# Altium PCB M1.5_A2L1_release1.0.PcbDoc
Units mm, origin at the board's own origin, x right, y up, seen from the top; angles counter-clockwise.
Board outline 40 x 50 mm, 2 copper layers (Top Layer, Bottom Layer); 59 components, 67 nets, 241 pads, 132 vias.
Unrouted connection lines stored in the file: 7.
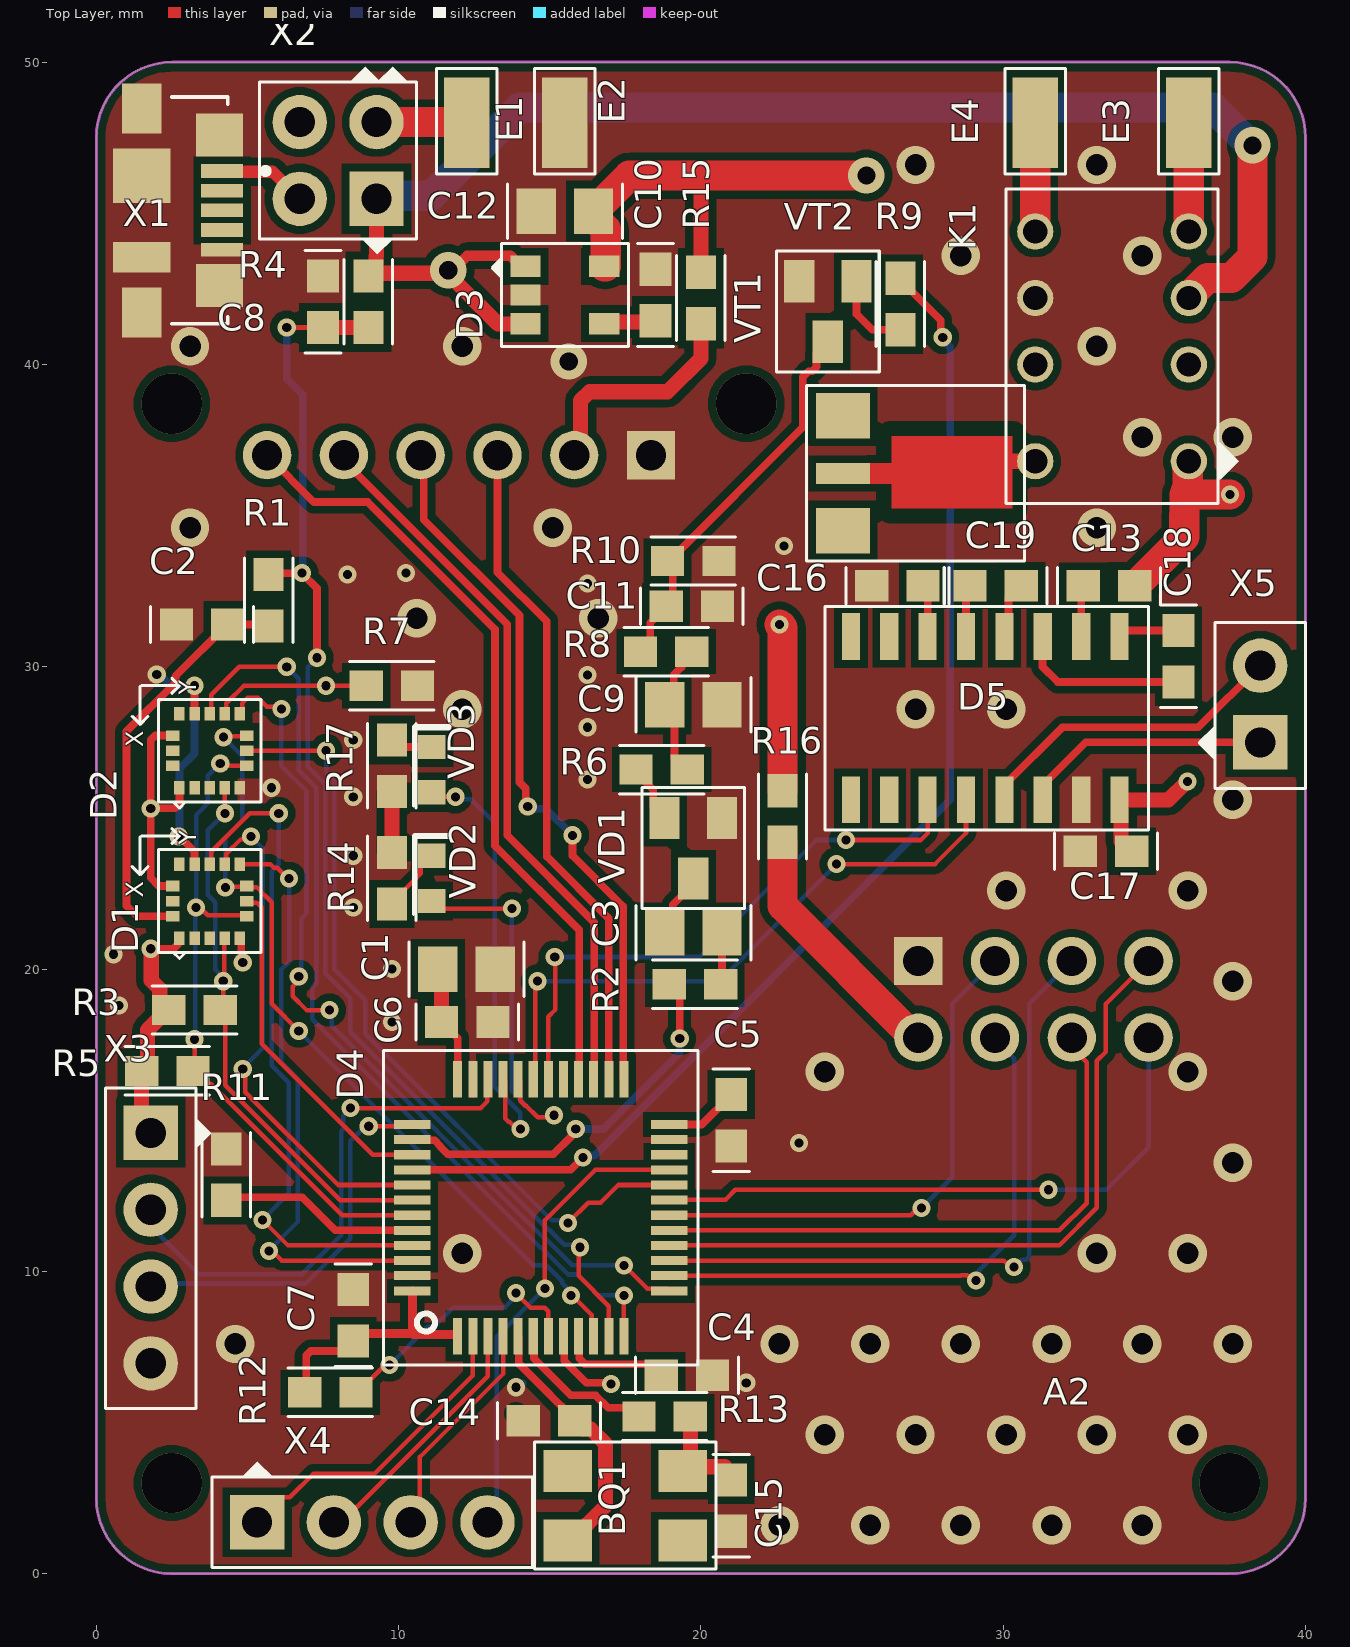
[diagram p0: Top Layer view]
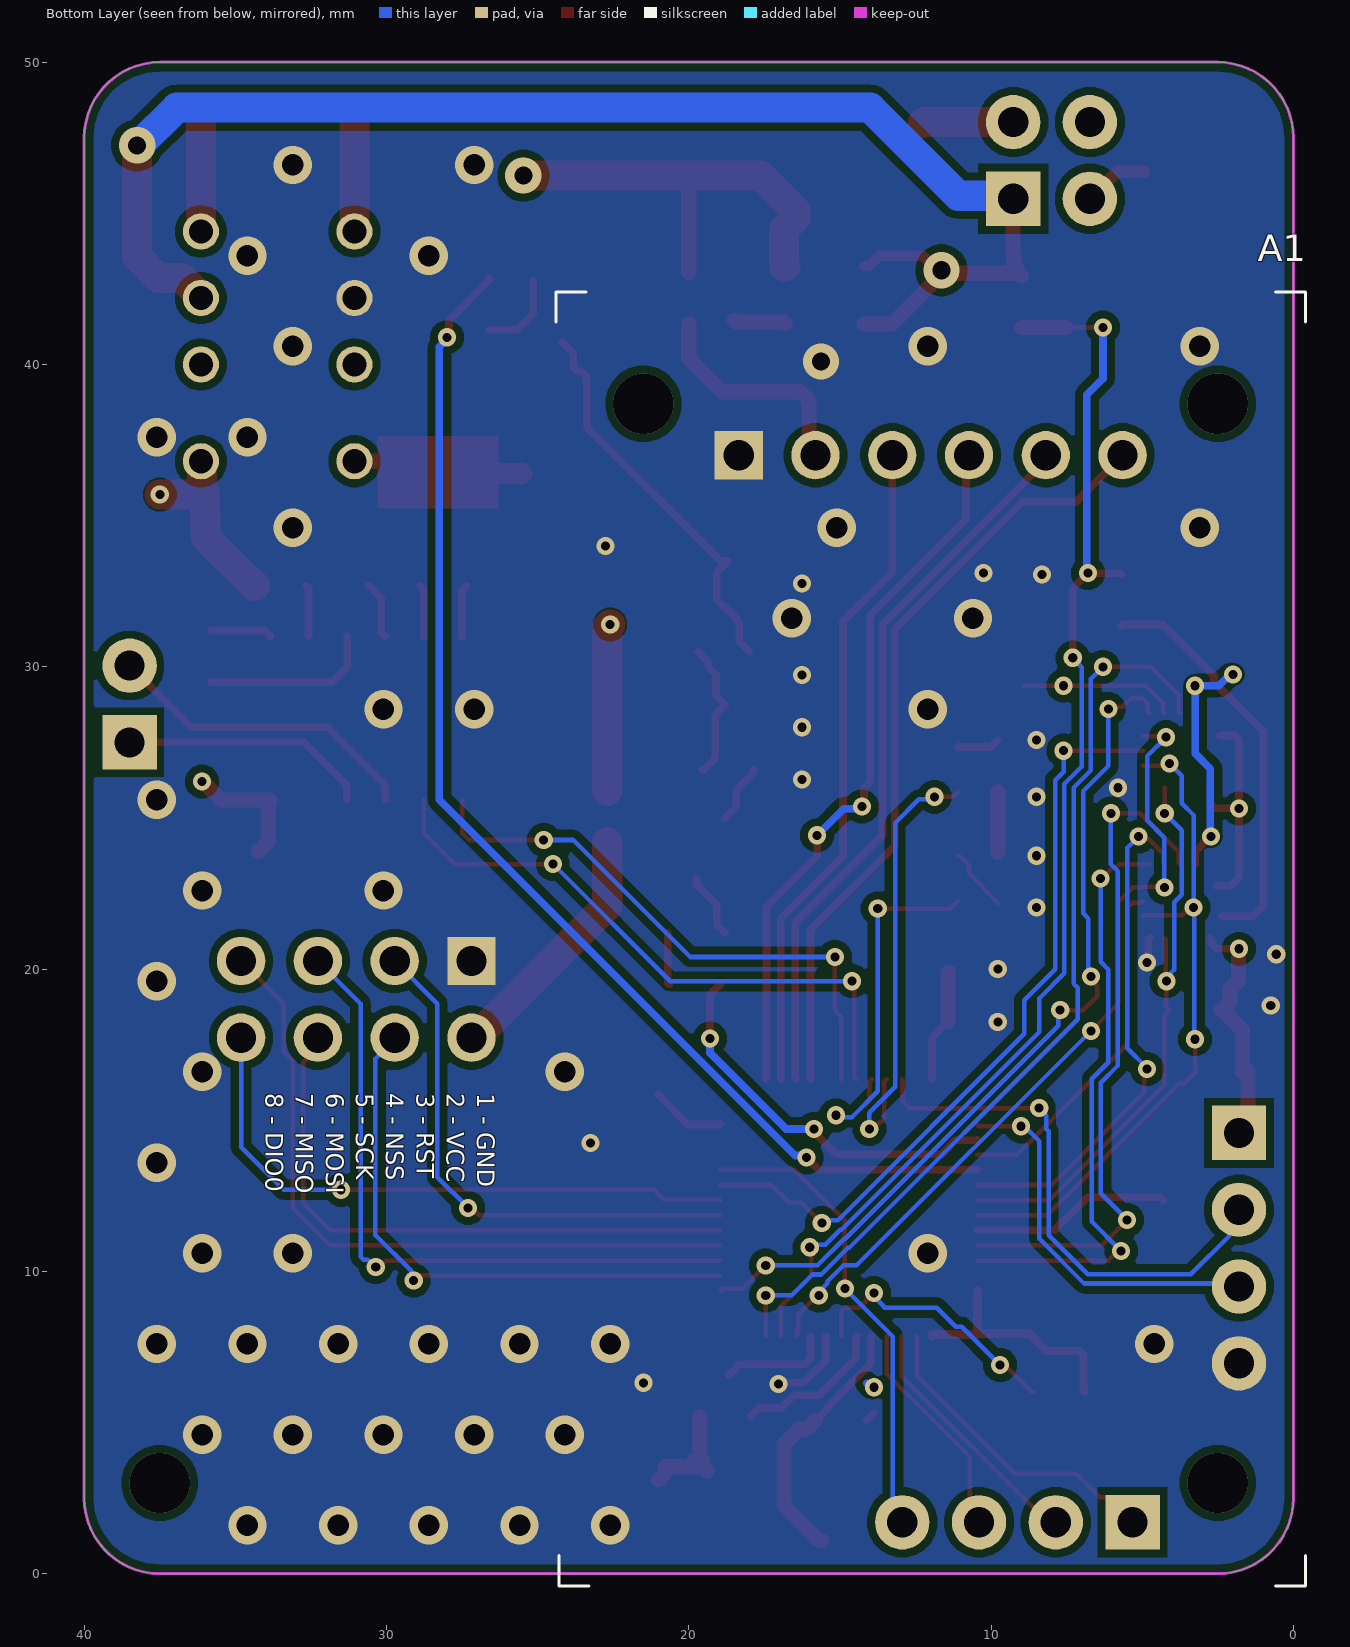
[diagram p1: Bottom Layer view, seen from below]
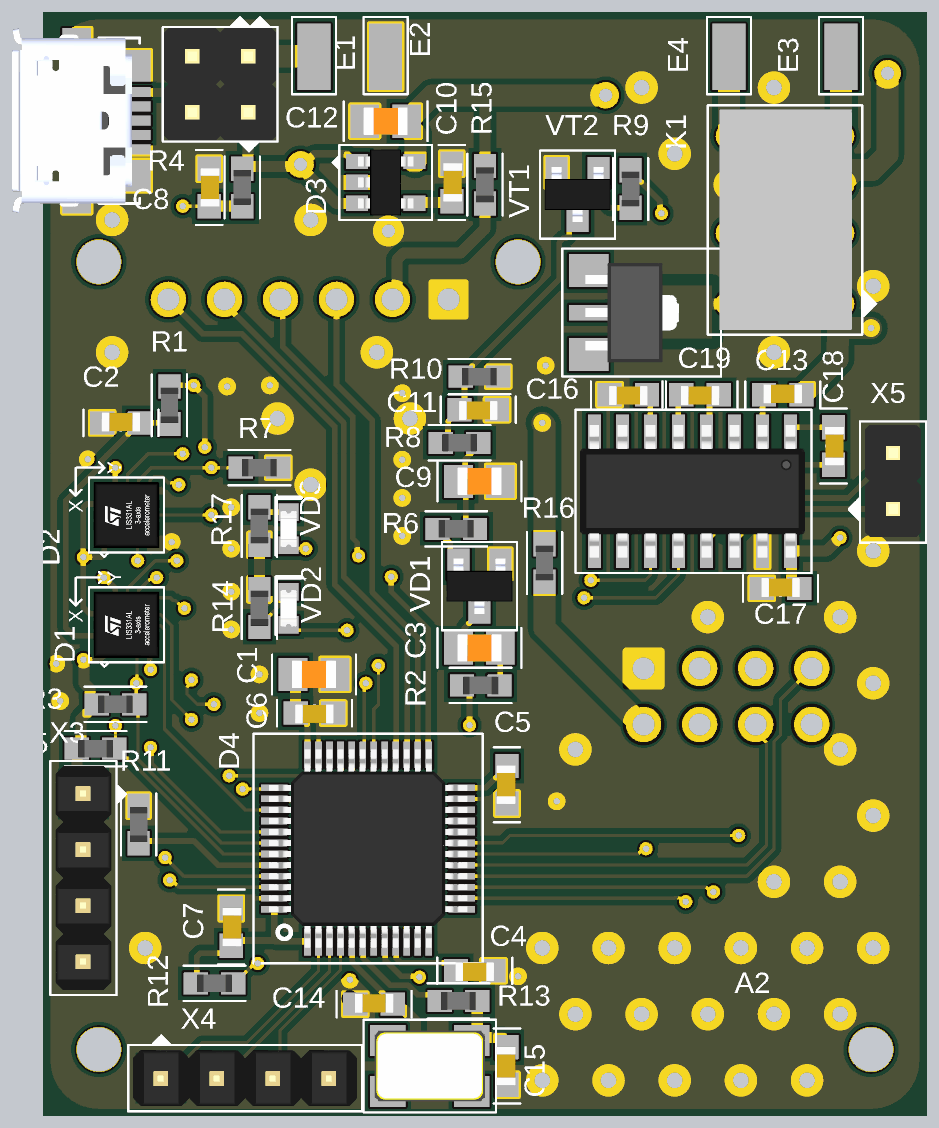
[diagram p2: 3D render of the assembled board from above, using the file's embedded part models]

## Layer stack, top to bottom
Top Solder: solder mask 0.0102, Solder Resist, Dk 3.5
Top Layer: signal copper 0.0356
Dielectric 1: dielectric 0.32, FR-4, Dk 4.8
Bottom Layer: signal copper 0.0356
Bottom Solder: solder mask 0.0102, Solder Resist, Dk 3.5

## Board outline
2.5,0 cw(c2.5,2.5) 0,2.5 0,47.5 cw(c2.5,47.5) 2.5,50 37.5,50 cw(c37.5,47.5) 40,47.5 40,2.5 cw(c37.5,2.5) 37.5,0

## Design rules (kind name [scope] priority, off if disabled: settings)
Clearance [All] p1: gap=0.254 ignorepadtopadclearanceinfootprint=TRUE except(0: Arc-Hole Track-Hole SMDPad-Hole THPad-Hole Via-Hole Fill-Hole Poly-Hole Region-Hole Text-Hole; 0.153: Arc-Arc Arc-Track Track-Track; 0.2: Arc-SMDPad Arc-Via Track-SMDPad Track-Via SMDPad-SMDPad; 0.5: Fill-Fill Fill-Poly Fill-Region Region-Region)
MinimumSolderMaskSliver [All] p1: minsoldermaskwidth=0.1
PlaneClearance [All] p1: clearance=1
PlaneConnect [All] p1: planeconnectstyle=Direct reliefexpansion=0.508 reliefentries=4 reliefconductorwidth=0.254 reliefairgap=0.254
PolygonConnect [All] p1: connectstyle=Direct reliefconductorwidth=0.254 reliefentries=4 polygonreliefangle="90 Angle" airgapwidth=0.254
RoutingVias [All] p1: holewidth=0.3 width=1.27 viastyle="Through Hole" minholewidth=0.3 minwidth=0 maxholewidth=1 maxwidth=1.27
SolderMaskExpansion [All] p1: expansion=0.102 istentingtop=FALSE
Width [All] p1: maxlimit=1 minlimit=0.15 preferedwidth=0.254
27 further rules are at their usual default settings.

## Classes and differential pairs
net class UART_EXT: UART_RX UART_TX
net class SW_INT: SWCLK SWDIO
net class RS-232: R1OUT_RS232 T1OUT_RS232
net class LED: LED1 LED2 UART_RX UART_TX
net class 8MHz: 8MHz_IN 8MHz_OUT NetBQ1_3

## Components (designator, comment, footprint, x,y, rotation, side; value= is the part's Value field where it differs from the comment)
A1 "Module SDCard-SPI 42*24mm" "Module SD2SPI" 12,37 r270 bottom locked
A2 "Ra-01 (LoRa SX-1278)" "Module SX1278" 31,19 r270 top
BQ1 "830055663" Quartz5032 17.5,2.25 r0 top
C1 "10µ" Cap0805 12.25,20 r0 top
C2 "0.1µ" Cap0603 3.5,31.4 r180 top
C3 "10µ" Cap0805 19.75,21.2 r0 top
C4 "0.1µ" Cap0603 19.538,6.565 r0 top
C5 "0.1µ" Cap0603 21,15 r270 top
C6 "0.1µ" Cap0603 12.27,18.25 r0 top
C7 "0.1µ" Cap0603 8.5,8.55 r90 top
C8 "0.1µ" Cap0603 7.5,42.075 r90 top
C9 "10µ" Cap0805 19.75,28.75 r0 top
C10 "0.47 µ" Cap0603 18.5,42.3 r90 top
C11 "0.1µ" Cap0603 19.7,32 r0 top
C12 "10µ" Cap0805 15.5,45.073 r180 top
C13 "0.1µ" Cap0603 33.5,32.68 r180 top
C14 "10p" Cap0603 14.976,5.056 r180 top
C15 "10p" Cap0603 21,2.25 r270 top
C16 "0.1µ" Cap0603 26.5,32.68 r0 top
C17 "0.1µ" Cap0603 33.399,23.9 r180 top
C18 "0.1µ" Cap0603 35.8,30.35 r90 top
C19 "0.1µ" Cap0603 29.75,32.68 r0 top
D1 "LIS3DHTR" LGA-16 3.75,22.25 r90 top locked
D2 "LIS3DHTR" LGA-16 3.75,27.225 r90 top locked
D3 "MIC5219-3.3BM5-TR" SOT23-5 15.5,42.3 r270 top
D4 "STM32F103C8T6TR" LQFP-48 14.704,12.109 r0 top locked
D5 "ADM3202ARNZ" "SOIC-16 (3.9mm Width)" 29.405,28.3 r270 top
E1 "Lamel_1pin" Lamel_1pin(1.5*3) 12.25,48 r0 top
E2 "Lamel_1pin" Lamel_1pin(1.5*3) 15.5,48 r0 top
E3 "Lamel_1pin" Lamel_1pin(1.5*3) 36.14,48 r0 top
E4 "Lamel_1pin" Lamel_1pin(1.5*3) 31.06,48 r0 top
K1 "IM02TS" IM02TS 33.6,40.6 r90 top
R1 "5K1" RES0603 5.7,32.2 r270 top
R2 "0R" RES0603 19.804,19.5 r0 top
R3 "10K" RES0603 3.25,18.646 r180 top
R4 "5K1" RES0603 9,42.075 r270 top
R5 "10K" RES0603 2.35,16.633 r180 top
R6 "10K" RES0603 18.7,26.6 r0 top
R7 "0R" RES0603 9.778,29.374 r180 top
R8 "2K" RES0603 18.85,30.5 r180 top
R9 "2K" RES0603 26.6,42 r270 top
R10 "10K" RES0603 19.748,33.5 r180 top
R11 "10K" RES0603 4.3,13.2 r90 top
R12 "10K" RES0603 7.743,6 r180 top
R13 "390R" RES0603 18.8,5.2 r0 top
R14 "5K1" RES0603 9.778,23.005 r90 top
R15 "0R" RES0603 20,42.2 r90 top
R16 "0R" RES0603 22.7,25.05 r90 top
R17 "5K1" RES0603 9.778,26.725 r270 top
VD1 "BAS40-04-HE3-08" SOT23 19.75,24 r0 top value=SOT-23-3
VD2 "19-213/GHC-YR1S2/3T" LED0603 11.1,23 r90 top
VD3 "19-213/GHC-YR1S2/3T" LED0603 11.1,26.6 r90 top
VT1 "BC846A,215" SOT23 24.2,41.75 r0 top
VT2 "BC868-25,115" SOT89 26.8,36.4 r270 top
X1 "47346-0001" MOLEX_47346-0001 1.5,45.1 r270 top
X2 "Header 2X2" PLS2-2 8,46.75 r180 top
X3 "Header 1X4" PLS1-4 1.8,10.77 r270 top locked
X4 "Header 1X4" PLS1-4 9.13,1.7 r0 top
X5 "Header 1X2" PLS1-2 38.5,28.77 r90 top

## Footprints (in the part's own frame and the unit in brackets; to place one, negate y for a bottom-side part, rotate by r counter-clockwise, add the part's x,y. Pads: shape width x height; smd on the part's side, far side on the other; paste and mask are expansions set on the pad)
Cap0603 [mm] "CC0603KRX7R9BB104"
  rect 1.1x1.05 smd paste+0: 1(-0.85,0)
  rect 1.1x1.05 smd: 2(0.85,0)
  silkscreen extent -1.7,-0.6 1.7,0.6, body extent -0.87,-0.48 0.87,0.4, height 0.95
Cap0805 [mm] "CC0805KKX7R6BB106"
  rect 1.3x1.5 smd: 1(-0.95,0) 2(0.95,0)
  silkscreen extent -1.9,-0.9 1.9,0.9, body extent -1,-0.63 1,0.63, height 0.8
IM02TS [mm] "IM02TS (THT VERSION)"
  round 1.2 hole 0.8 unplated: 1(-3.8,-2.54) 2(-0.6,-2.54) 3(1.6,-2.54) 4(3.8,-2.54) 5(3.8,2.54) 6(1.6,2.54) 7(-0.6,2.54) 8(-3.8,2.54)
  silkscreen extent -5.2,-4.2 5.2,3.5, body extent -4.99,-3.04 5.01,2.96, height 4.65
Lamel_1pin(1.5*3) [mm]
  rect 1.5x3 smd: 1(0,0)
  silkscreen extent -1,-1.7 1,1.79
LED0603 [mm] "Led_19/213_EVERLIGHT"
  rect 0.8x0.9 smd: 1(-0.75,0) 2(0.75,0)
  silkscreen extent -1.2,-0.55 1.4,0.6, body extent -0.83,-0.37 0.82,0.36, height 0.68
LGA-16 [mm] "LIS3DHTR (3*3)"
  rect 0.45x0.35 smd paste-1 mask+0.05: 1(-1.225,1)
  rect 0.45x0.35 smd mask+0.05: 2(-1.225,0.5) 3(-1.225,0) 4(-1.225,-0.5) 5(-1.225,-1) 9(1.225,-1) 10(1.225,-0.5) 11(1.225,0) 12(1.225,0.5) 13(1.225,1)
  rect 0.35x0.45 smd mask+0.05: 6(-0.5,-1.225) 7(0,-1.225) 8(0.5,-1.225) 14(0.5,1.225) 15(0,1.225) 16(-0.5,1.225)
  silkscreen extent -1.9,-1.7 2.4,2.56, body extent -1.5,-1.5 1.5,1.5, height 1.01
LQFP-48 [mm] "Dest: STM32F103C8T6 - (7*7)"
  rect 0.3x1.2 smd: 1(-2.75,-4.25) 2(-2.25,-4.25) 3(-1.75,-4.25) 4(-1.25,-4.25) 5(-0.75,-4.25) 6(-0.25,-4.25) 7(0.25,-4.25) 8(0.75,-4.25) 9(1.25,-4.25) 10(1.75,-4.25) 11(2.25,-4.25) 12(2.75,-4.25) 25(2.75,4.25) 26(2.25,4.25) 27(1.75,4.25) 28(1.25,4.25) 29(0.75,4.25) 30(0.25,4.25) 31(-0.25,4.25) 32(-0.75,4.25) 33(-1.25,4.25) 34(-1.75,4.25) 35(-2.25,4.25) 36(-2.75,4.25)
  rect 1.2x0.3 smd: 13(4.25,-2.75) 14(4.25,-2.25) 15(4.25,-1.75) 16(4.25,-1.25) 17(4.25,-0.75) 18(4.25,-0.25) 19(4.25,0.25) 20(4.25,0.75) 21(4.25,1.25) 22(4.25,1.75) 23(4.25,2.25) 24(4.25,2.75) 37(-4.25,2.75) 38(-4.25,2.25) 39(-4.25,1.75) 40(-4.25,1.25) 41(-4.25,0.75) 42(-4.25,0.25) 43(-4.25,-0.25) 44(-4.25,-0.75) 45(-4.25,-1.25) 46(-4.25,-1.75) 47(-4.25,-2.25) 48(-4.25,-2.75)
  silkscreen extent -5.2,-5.2 5.2,5.2, body extent -4.5,-4.5 4.5,4.5, height 1.6
"Module SD2SPI" [mm] "Arduino MicroSD to SPI Card reader 42*24*12mm"
  rect 1.6x1.6 hole 1 unplated: 1(0,-6.35)
  round 1.6 hole 1 unplated: 2(0,-3.81) 3(0,-1.27) 4(0,1.27) 5(0,3.81) 6(0,6.35)
  silkscreen extent -5.4,-12.4 37.4,12.4
"Module SX1278" [mm] "Ra-01"
  rect 1.6x1.6 hole 1 unplated mask+0.15: 1(-1.27,-3.81)
  round 1.6 hole 1 unplated mask+0.15: 2(1.27,-3.81) 3(-1.27,-1.27) 4(1.27,-1.27) 5(-1.27,1.27) 6(1.27,1.27) 7(-1.27,3.81) 8(1.27,3.81)
MOLEX_47346-0001 [mm] "Molex MicroUSB 473460001"
  rect 0.45x1.38 smd: 1(-1.3,2.66) 2(-0.65,2.66) 3(0,2.66) 4(0.65,2.66) 5(1.3,2.66)
  rect 1.425x1.55 smd: S1(-2.488,2.575) S2(2.488,2.575)
  rect 1.65x1.3 smd: S3(-3.375,0) S6(3.375,0)
  rect 1.8x1.9 smd: S4(-1.15,0)
  rect 1x1.9 smd: S5(1.55,0)
  silkscreen extent -3.75,1 3.75,4.2, body extent -4.18,-2.93 4.18,2.5, height 2.7
PLS1-2 [mm] "1R2 ( pitch 2.54mm) KLS1-207-1-2S"
  rect 1.8x1.8 hole 1 mask+0.102: 1(-1.27,0)
  round 1.8 hole 1: 2(1.27,0)
  silkscreen extent -2.8,-1.5 2.7,2, body extent -2.54,-1.27 2.54,1.27, height 8.54
PLS1-4 [mm] "1R4 ( pitch 2.54mm) KLS1-207-1-4S"
  rect 1.8x1.8 hole 1: 1(-3.81,0)
  round 1.8 hole 1: 2(-1.27,0) 3(1.27,0) 4(3.81,0)
  silkscreen extent -5.3,-1.5 5.3,2, body extent -5.08,-1.27 5.08,1.27, height 9.2
PLS2-2 [mm] "2R2 ( pitch 2.54mm) KLS1-207-2-2S"
  rect 1.8x1.8 hole 1: 1(-1.27,1.27)
  round 1.8 hole 1: 2(-1.27,-1.27) 3(1.27,1.27) 4(1.27,-1.27)
  silkscreen extent -2.6,-3.1 2.6,3.1, body extent -2.54,-2.54 2.54,2.54, height 8.54
Quartz5032 [mm] "WE-830055663"
  rect 1.6x1.4 smd: 1(-1.9,-1.15) 2(1.9,-1.15) 3(1.9,1.15) 4(-1.9,1.15)
  silkscreen extent -3,-2.1 3,2.1, body extent -2.5,-1.6 2.5,1.6, height 1
RES0603 [mm]
  rect 1.1x1 smd: 1(-0.85,0) 2(0.85,0)
  silkscreen extent -1.4,-0.8 1.4,0.8, body extent -0.8,-0.4 0.8,0.4, height 0.45
"SOIC-16 (3.9mm Width)" [mm] "ADM3202ARNZ (0.154\", 3.90mm Width)"
  rect 1.55x0.6 smd: 1(-2.7,4.445) 2(-2.7,3.175) 3(-2.7,1.905) 4(-2.7,0.635) 5(-2.7,-0.635) 6(-2.7,-1.905) 7(-2.7,-3.175) 8(-2.7,-4.445) 9(2.7,-4.445) 10(2.7,-3.175) 11(2.7,-1.905) 12(2.7,-0.635) 13(2.7,0.635) 14(2.7,1.905) 15(2.7,3.175) 16(2.7,4.445)
  silkscreen extent -3.7,-5.3 3.7,5.4, body extent -3,-5.1 3,5.1, height 1.7
SOT23 [mm] "BC846"
  rect 1x1.4 smd: 1(0.95,1) 2(-0.95,1) 3(0,-1)
  silkscreen extent -1.7,-2 1.7,2, body extent -1.5,-1.25 1.5,1.25, height 1.1
SOT23-5 [mm] "MIC5219-3.3BM5-TR"
  rect 0.7x1 smd: 1(-0.95,-1.3) 2(0,-1.3) 3(0.95,-1.3) 4(0.95,1.3) 5(-0.95,1.3)
  silkscreen extent -1.7,-2.4 1.7,2.1, body extent -1.5,-1.25 1.5,1.25, height 1.05
SOT89 [mm] "BC868 Transistor NPN"
  rect 1.5x1.8 smd: 1(1.9,-2.1) 3(-1.9,-2.1)
  rect 0.7x1.8 smd: 2(0,-2.1)
  Top Layer region: -1.238,-0.5 1.162,-0.5 1.162,3.5 -1.238,3.5
  Top Layer lines w0.7: 0,-1.275 0,-0.5
  silkscreen extent -2.9,-3.3 2.9,3.9, body extent -2.25,-2.25 2.25,2, height 1.54

## Part data
A1: library part "Module SDCard-SPI", "MicroSD Card adapter (42*24mm)/Arduino", Current consumption typ(max)="80mA (200mA)", Supply voltage=5±0.5V, ComponentLink1Description=Link, ComponentLink1URL=http://datalogger.pbworks.com/w/file/fetch/89507207/Datalogger%20-%20SD%20Memory%20Reader%20Datasheet.pdf, Connections="6pin IDC1-6", Dimensions=42*24*12mm, Manufacture Part Number="Module SDCard-SPI 42*24mm", Support format="Micro SDCard(<=2G), Micro SDHC(<=32G)", Weight=5g
A2: library part "Module SX1278", "SX1278 LoRa  433 MHZ/SPI /Spring Antenna/Ra - 01", ComponentLink1Description=Link, ComponentLink1URL=http://www.ai-thinker.com/pro_view-5.html, Manufacture Part Number="Ra-01 (LoRa SX-1278)"
BQ1: "WE-XTAL QUARTZ CRYSTAL 8.0 MHZ", Digi-Key Part Number=1923-830055663TR-ND, ESR (Equivalent Series Resistance)="150 Ohms", Frequency="8 MHz", Frequency Stability=±30ppm, Frequency Tolerance=±20ppm, Load Capacitance=18pF, Manufacture="Würth Elektronik", Operating Mode=Fundamental, Package/Case="4-SMD, No Lead", Catagory="Crystals, Oscillators, Resonators, Crystals", ComponentLink1Description=HelpURL, ComponentLink1URL=https://www.digikey.com/en/products/detail/w%C3%BCrth-elektronik/830055663/13900244?s=N4IgTCBcDaIBwGYAMSCsqBsGEgLoF8g, Manufacture Part Number=830055663, Price ($)=$0.65, Series=CFPX-104, Type="MHz Crystal"
C1 C3 C9 C12: library part CC0805KKX7R6BB106, "CAP CER 10UF 10V X7R 0805", Digi-Key Part Number=311-1879-2-ND, Manufacture=YAGEO, Package/Case="0805 (2012 Metric)", Temperature Coefficient=X7R, Tolerance=±10%, Capacitance=10µ, Catagory="Capacitors, Ceramic Capacitors", ComponentLink2Description=Link, ComponentLink2URL=https://www.digikey.com/en/products/detail/yageo/CC0805KKX7R6BB106/5195285, Manufacture Part Number=CC0805KKX7R6BB106, Price($/10)=$1.62
C2 C4 C5 C6 C7 C8 C11 C13 C16 C17 C18 C19: library part CC0603KRX7R9BB104, "CAP CER 0.1UF 50V X7R 0603", Digi-Key Part Number=311-1344-2-ND, Manufacture=YAGEO, Package/Case="0603 (1608 Metric)", Temperature Coefficient=X7R, Tolerance=±10%, Capacitance=0.1µ, Catagory="Capacitors, Ceramic Capacitors", ComponentLink2Description=Link, ComponentLink2URL=https://www.digikey.com/en/products/detail/yageo/CC0603KRX7R9BB104/2103082?s=N4IgTCBcDaIMJwAwDZEGYDSAlAGgdiwE4AhYgRkQBYQBdAXyA, Manufacture Part Number=CC0603KRX7R9BB104, Price($/10)=$0.54
C10: library part CC0603KRX7R6BB474, "CAP CER 0.47UF 10V X7R 0603", Digi-Key Part Number=311-1798-2-ND, Manufacture=YAGEO, Package/Case="0603 (1608 Metric)", Temperature Coefficient=X7R, Tolerance=±10%, Capacitance="0.47 µ", Catagory="Capacitors, Ceramic Capacitors", ComponentLink2Description=Link, ComponentLink2URL=https://www.yageo.com/upload/media/product/productsearch/datasheet/mlcc/UPY-GPHC_X7R_6.3V-to-50V_20.pdf, ComponentLink3Description="Link supplier", ComponentLink3URL=https://www.digikey.com/en/products/detail/yageo/CC0603KRX7R6BB474/5195206?s=N4IgTCBcDaIMJwAwDZEGYDSAlAGgdi2QCEiAWPUkAXQF8g, Manufacture Part Number=CC0603KRX7R6BB474, Price($/10)=$1.22
C14 C15: library part CQ0603JRNPO9BN100, "CAP CER 10PF 50V C0G/NPO 0603", Digi-Key Part Number=CQ0603JRNPO9BN100-ND, Manufacture=YAGEO, Package/Case="0603 (1608 Metric)", Temperature Coefficient="COG, NPO", Tolerance=±5%, Capacitance=10p, Catagory="Capacitors, Ceramic Capacitors", ComponentLink2Description=Link, ComponentLink2URL=https://www.digikey.com/en/products/detail/yageo/cq0603jrnpo9bn100/6097785, Manufacture Part Number=CQ0603JRNPO9BN100, Price($/20k)=$970,8
D1 D2: "ACCEL 2-16G I2C/SPI 16LGA", Digi-Key Part Number="497-10613-2-ND - Tape & Reel", Manufacture=STMicroelectronics, Package/Case="16-LGA (3x3)", Catagory="Sensors, Transducers, Motion Sensors - Accelerometers", ComponentLink2Description=Link, ComponentLink2URL=https://www.st.com/en/mems-and-sensors/lis3dh.html, ComponentLink3Description="Link Supplier", ComponentLink3URL=https://www.digikey.com/en/products/detail/stmicroelectronics/LIS3DHTR/2334338?s=N4IgTCBcDaIDIEkDKBmAIgCQCoCUQF0BfIA, Manufacture Part Number=LIS3DHTR, Price($)=$2.11000
D3: "IC REG LINEAR 3.3V 500MA SOT23-5", Current - Output=500mA, Current - Quiescent (Iq)="8 µA", Manufacture="Microchip Technology", Package/Case=SOT-23-5, Voltage - Input (Max)=12V, Voltage - Output (Min/Fixed)=3.3V, Voltage Dropout (Max)="0.6V @ 500mA", Catagory="Integrated Circuits (ICs), Power Management (PMIC), Voltage Regulators - Linear", ComponentLink2Description=Link, ComponentLink2URL=https://ww1.microchip.com/downloads/en/DeviceDoc/MIC5219-500mA-Peak-Output-LDO-Regulator-DS20006021A.pdf, ComponentLink3Description="Link Supplier", ComponentLink3URL=https://www.digikey.com/en/products/detail/microchip-technology/MIC5219-3-3BM5-TR/771289?s=N4IgTCBcDaILIEkDCBWMBGAnAWgMwDpcAhOFEAXQF8g, Control Features=Enable, Digi-Key Part Number=MIC5219-3.3BM5-TR, Manufacture Part Number=MIC5219-3.3BM5-TR, PSRR="75dB (120Hz)"
D4: library part STM32F103C8T6, "ARM® Cortex®-M3 STM32F1 Microcontroller IC 32-Bit Single-Core 72MHz 64KB (64K x 8) FLASH 48-LQFP (7x7)", Digi-Key Part Number=497-17666-2-ND, Manufacture=STMicroelectronics, Package/Case=48-LQFP, Catagory="Integrated Circuits (ICs), Embedded Microcontrollers", ComponentLink2Description=Link, ComponentLink2URL=https://www.digikey.com/en/products/detail/stmicroelectronics/STM32F103C8T6TR/2122442, Manufacture Part Number=STM32F103C8T6TR, Price($)=$7.64, sym_version=1
D5: "IC TRANSCEIVER FULL 2/2 16SOIC", Digi-Key Part Number=ADM3202ARNZ-REELTR-ND, Manufacture="Analog Devices Inc.", Package/Case="16-SOIC (0.154\", 3.90mm Width)", Catagory="Integrated Circuits (ICs), Interface, Drivers, Receivers, Transceivers", ComponentLink2Description=Link, ComponentLink2URL=https://www.digikey.com/en/products/detail/analog-devices-inc/adm3202arnz-reel/994470, Manufacture Part Number=ADM3202ARNZ, Price($)=$3.60000
K1: "RELAY TELECOM DPDT 2A 4.5VDC", Coil Voltage=4.5VDC, Contact Rating (Current)="2 A", Digi-Key Part Number=PB1093-ND, Manufacture="TE Connectivity Potter & Brumfield Relays", Switching Voltage="250VAC, 220VDC - Max", Catagory="Relays, Signal Relays, Up to 2 Amps", ComponentLink2Description="Link Supplier", ComponentLink2URL=https://www.digikey.com/en/products/detail/te-connectivity-potter-brumfield-relays/IM02TS/1633979?s=N4IgTCBcDaIJIFkAMYAqBlEBdAvkA, ComponentLink3Description=Link, ComponentLink3URL=https://www.te.com/commerce/DocumentDelivery/DDEController?Action=srchrtrv&DocNm=1-1773734-7_IM_Relay_I_Type&DocType=DS&DocLang=English, Contact Form="DPDT (2 Form C)", Manufacture Part Number=IM02TS, Mounting Type="Through Hole", Price($)=$4.59, Series="IM, AXICOM"
R1 R4 R14 R17: library part RC0603FR-075K1L, "RES 5K1 OHM 1% 1/10W 0603", Digi-Key Part Number=311-5.10KHRTR-ND, Manufacture=Yageo, Package/Case="0603 (1608 Metric)", Power(Watts)="0.1W, 1/10W", Tolerance=±1%, Catagory=Resistors, ComponentLink1Description=HelpURL, ComponentLink1URL=https://www.digikey.com/en/products/detail/yageo/RC0603FR-075K1L/727268?s=N4IgTCBcDaIEoGEAMA2JBmAYnAtEg7AKwDSAjADIgC6AvkA, Manufacture Part Number=RC0603FR-075K1L, Price 1k($)=$3.90, Resistance=5K1
R2 R7 R15 R16: library part RC0603FR-070RL, "RES 0 OHM JUMPER 1/10W 0603", Digi-Key Part Number=311-0.0HRTR-ND, Manufacture=Yageo, Package/Case="0603 (1608 Metric)", Power(Watts)="0.1W, 1/10W", Tolerance=±1%, Catagory=Resistors, ComponentLink1Description="Link Supplier", ComponentLink1URL=https://www.digikey.com/en/products/detail/yageo/RC0603FR-075K1L/727268?s=N4IgTCBcDaIEoGEAMA2JBmAYnAtEg7AKwDSAjADIgC6AvkA, ComponentLink2Description=Link, ComponentLink2URL=https://www.yageo.com/upload/media/product/productsearch/datasheet/rchip/PYu-RC_Group_51_RoHS_L_12.pdf, Manufacture Part Number=RC0603FR-070RL, Price 1k($)=$3.29, Resistance=0R
R3 R5 R6 R10 R11 R12: library part RC0603FR-0710KL, "RES 10K OHM 1% 1/10W 0603", Digi-Key Part Number=311-10.0KHRTR-ND, Manufacture=Yageo, Package/Case="0603 (1608 Metric)", Power(Watts)="0.1W, 1/10W", Tolerance=±1%, Catagory=Resistors, ComponentLink1Description=HelpURL, ComponentLink1URL=https://www.digikey.com/en/products/detail/yageo/RC0603FR-0710KL/726880?s=N4IgTCBcDaIEoGEAMA2JBmAYnAtEg7AIxIDSAMiALoC%2BQA, Manufacture Part Number=RC0603FR-0710KL, Price 1k($)=$3.90, Resistance=10K
R8 R9: library part RC0603FR-072KL, "RES 2K OHM 1% 1/10W 0603", Digi-Key Part Number=311-2.00KHRTR-ND, Manufacture=Yageo, Package/Case="0603 (1608 Metric)", Power(Watts)="0.1W, 1/10W", Tolerance=±1%, Catagory=Resistors, ComponentLink1Description="Link Supplier", ComponentLink1URL=https://www.digikey.com/en/products/detail/yageo/RC0603FR-072KL/727009?s=N4IgTCBcDaIEoGEAMA2JBmAYnAtEg7GANIAyIAugL5A, ComponentLink2Description=Link, ComponentLink2URL=https://www.yageo.com/upload/media/product/productsearch/datasheet/rchip/PYu-RC_Group_51_RoHS_L_12.pdf, Manufacture Part Number=RC0603FR-072KL, Price 1k($)=$3.90, Resistance=2K
R13: library part RC0603FR-07390RL, "RES 390 OHM 1% 1/10W 0603", Digi-Key Part Number=311-390HRTR-ND, Manufacture=Yageo, Package/Case="0603 (1608 Metric)", Power(Watts)="0.1W, 1/10W", Tolerance=±1%, Catagory=Resistors, ComponentLink1Description=HelpURL, ComponentLink1URL=https://www.digikey.com/en/products/detail/yageo/RC0603FR-07390RL/727198, Manufacture Part Number=RC0603FR-07390RL, Price 1k($)=$3.90, Resistance=390R
VD1: library part BAS40-04, "DIODE ARRAY SCHOTTKY 40V SOT23", Current - Average Rectified (Io) (per Diode)=200mA, Current - Reverse Leakage @ Vr="100 nA @ 30 V", Digi-Key Part Number=112-BAS40-04-HE3-08TR-ND, Manufacture="Vishay General Semiconductor - Diodes Division", Package/Case=SOT-23-3, Voltage - DC Reverse (Vr) (Max)="40 V", Voltage - Forward (Vf) (Max) @ If="1 V @ 40 mA", Catagory="Discrete Semiconductor Products, Diodes - Rectifiers - Arrays", ComponentLink2Description="Link Supplier", ComponentLink2URL=https://www.digikey.com/en/products/detail/vishay-general-semiconductor-diodes-division/BAS40-04-HE3-08/4830200, ComponentLink3Description=Link, ComponentLink3URL=https://www.vishay.com/docs/85701/bas40v.pdf, Diode Configuration="1 Pair Series Connection", Diode Type=Schottky, Manufacture Part Number=BAS40-04-HE3-08, Price 10pcs($)="$3.03 per 10pcs", Reverse Recovery Time (trr)="5 ns"
VD2 VD3: "LED GREEN CLEAR 0603 SMD", Color=Green, Current - Test=20mA, Digi-Key Part Number=19-213/GHC-YR1S2/3T-ND, Lens Color=Colorless, Manufacture="Everlight Electronics Co Ltd", Millicandela Rating=199mcd, Package/Case="0603 (1608 Metric)", Voltage - Forward (Vf) (Typ)=3.3V, Catagory="Optoelectronics, LED Indication - Discrete", ComponentLink1Description=HelpURL, ComponentLink1URL=https://www.digikey.com/en/products/detail/everlight-electronics-co-ltd/19-213-GHC-YR1S2-3T/2691511?s=N4IgTCBcDaIDIFMAmACAjATgLRjQZgHoBxACQGEsBNAJTQGUwC8AVEAXQF8g, Height(Max)=0.70mm, Lens Size="1.20mm x 0.80mm", Lens Style="Rectangle with Flat Top", Lens Transparency=Clear, Manufacture Part Number=19-213/GHC-YR1S2/3T, Price 1k($)=$7.02, Viewing Angle=120°, Wavelength - Dominant=528nm, Wavelength - Peak=518nm
VT1: library part BC846, "TRANS NPN 65V 0.1A SOT-23-3", Current - Collector (Ic) (Max)="100 mA", Current - Collector Cutoff (Max)="15nA (ICBO)", DC Current Gain (hFE) (Min) @ Ic, Vce="110 @ 2mA, 5V", Digi-Key Part Number=1727-4239-2-ND, Frequency - Transition=100MHz, Manufacture="Nexperia USA Inc.", Operating Temperature="150°C (TJ)", Package/Case=SOT-323, Power(Watts)="250 mW", Voltage - Collector Emitter Breakdown (Max)="65 V", Catagory="Discrete Semiconductor Products, Transistors - Bipolar (BJT) - Single", ComponentLink1Description="Link Supplier", ComponentLink1URL=https://www.digikey.com/en/products/detail/nexperia-usa-inc/BC846A-215/1232259, ComponentLink2Description=Link, ComponentLink2URL=https://assets.nexperia.com/documents/data-sheet/BC846XW_SER.pdf, Manufacture Part Number=BC846A,215, Price ($)=$0.14, Vce Saturation (Max) @ Ib, Ic="400mV @ 5mA, 100mA"
VT2: library part BC868-25, "TRANS NPN 20V 2A SOT89", Current - Collector (Ic) (Max)="2 A", Current - Collector Cutoff (Max)="100nA (ICBO)", DC Current Gain (hFE) (Min) @ Ic, Vce="160 @ 500mA, 1V", Digi-Key Part Number=1727-1568-2-ND, Frequency - Transition=170MHz, Manufacture="Nexperia USA Inc.", Operating Temperature="150°C (TJ)", Package/Case=TO-243AA, Power(Watts)="500 mW", Voltage - Collector Emitter Breakdown (Max)="20 V", Catagory="Discrete Semiconductor Products, Transistors - Bipolar (BJT) - Single", ComponentLink1Description=Link, ComponentLink1URL=https://assets.nexperia.com/documents/data-sheet/BCP68_BC868_BC68PA.pdf, ComponentLink2Description="Link Supplier", ComponentLink2URL=https://www.digikey.com/en/products/detail/nexperia-usa-inc/BC868-25-115/1232370, Manufacture Part Number=BC868-25,115, Price ($)=$0.54, Transistor Type=NPN, Vce Saturation (Max) @ Ib, Ic="600mV @ 200mA, 2A"
X1: "CONN RCPT USB2.0 MICRO B SMD R/A", Current Rating (Amps)="1A, 1.8A", Digi-Key Part Number=WM17141TR-ND, Manufacture=Molex, Material Flammability Rating="UL94 V-0", Voltage - Rated=30VAC, Connector Type="USB - micro B", Contact Finish=Gold, Manufacture Part Number=47346-0001, Mating Cycles=10000, Mounting Feature=Horizontal, Mounting Type="Surface Mount, Right Angle", Series=47346, Shell/Shielding Material="Steel, Stainless", Shielding=Shielded, SnapEDA_Link=https://www.snapeda.com/parts/47346-0001/Molex/view-part/53503/?ref=snap, Specifications="USB 2.0"
X2: library part KLS1-207-2-2S, "2X2 Pin Header Double Row Through Hole Pitch 2.54(PLS-2)", Manufacture="Assmann WSW components, Inc", Manufacture Part Number="Header KLS1-207-2-2S", Catagory="Connector Headers and PCB Receptacles", ComponentLink1Description=HelpURL, ComponentLink1URL=https://www.arrow.com/en/products/aw140-eg-g02a/assmann-wsw-components-inc
X3 X4: library part KLS1-207-1-4S, "1X4 Pin Header Single Row Through Hole Pitch 2.54", Manufacture="Assmann WSW components, Inc", Catagory="Connector Headers and PCB Receptacles", ComponentLink1Description=HelpURL, ComponentLink1URL=https://www.arrow.com/en/products/aw140-eg-g02a/assmann-wsw-components-inc
X5: library part KLS1-207-1-2S, "1X2 Pin Header Single Row Through Hole Pitch 2.54(PLS-2)", Manufacture="Assmann WSW components, Inc", Catagory="Connector Headers and PCB Receptacles", ComponentLink1Description=HelpURL, ComponentLink1URL=https://www.arrow.com/en/products/aw140-eg-g02a/assmann-wsw-components-inc

## Via types
v1: diameter 0.6, hole 0.3, Top Layer to Bottom Layer, 80 vias
v2: diameter 1.27, hole 0.711, Top Layer to Bottom Layer, 44 vias
v3: diameter 2, hole 2, Top Layer to Bottom Layer, 4 vias
v4: diameter 1.2, hole 0.6, Top Layer to Bottom Layer, 4 vias

## Nets (pads, with @x,y where several pads share a name; then routed paths per layer and width w, separated by ;. In a path a pad name is that pad's centre, name@x,y a point inside that pad or via, vN(x,y) a via of type N, cw(c..) or ccw(c..) an arc to the next point about the centre after c; other vN are vias at no path point)
8MHz_IN: BQ1.1 C14.1 D4.5 | length 8.7
  Top Layer w0.254: D4.5 13.977,7.836 13.977,6.954 14.69,6.242 15.403,5.529 15.403,5.454 15.801,5.056 C14.1
  Top Layer w0.5: BQ1.1 15.7,1.1 16.85,2.25 16.85,4.286 16.356,4.781 16.101,4.781 C14.1
8MHz_OUT: D4.6 R13.1 | length 5
  Top Layer w0.254: D4.6 14.477,7.836 14.477,7.123 15.693,5.908 16.512,5.908 16.933,5.486 17.664,5.486 R13.1
GND: A1.1 A2.1 C1.2 C2.2 C4.2 C5.2 C6.2 C7.2 C8.2 C9.2 C10.2 C11.2 C12.2 C14.2 C15.2 C16.1 C17.2 D1.5 D1.12 D2.5 D2.12 D3.2 D4.8 D4.23 D4.35 D4.47 D5.15 E2.1 K1.6 R7.1 R10.1 R11.2 R14.2 R17.2 VD1.1 VT1.2 X1.5 X1.S1 X1.S2 X1.S3 X1.S4 X1.S5 X1.S6 X3.4 | length 14.9
  Top Layer w0.254: v1(2.727,24.388) 2.75,24.388 3.25,23.888 D1.12 ; D2.12 v1(3.25,29.374) ; D1.5 4.797,20.978 4.797,20.267 v1(4.845,20.22) ; C14.2@13.878,5.303 C14.2 ; D4.8 15.477,7.836 15.477,7.047 16.21,6.315 16.991,6.315 v1(17.028,6.278)
  Top Layer w0.5: R14.2 R17.2
  Bottom Layer w0.254: v1(2,29.75) 2.094,29.75 2.47,29.374 v1(3.25,29.374) 3.25,27.131 2.75,26.631 2.75,24.411 v1(2.727,24.388) ; v1(13.878,6.167) 13.972,6.167 v1@14.11,6.305
  other v1: 21.5,6.315 23.25,14.25 9.778,18.25 0.75,18.796 9.778,20 0.568,20.491 8.5,22.039 8.5,23.75 8.5,25.7 5.8,26 16.25,26.277 8.5,27.575 16.25,28 16.25,29.732 16.25,32.75 8.312,33.05 10.25,33.1 22.75,34
  other v2: 22.6,1.6 25.6,1.6 28.6,1.6 31.6,1.6 34.6,1.6 24.1,4.6 27.1,4.6 30.1,4.6 33.1,4.6 36.1,4.6 4.6,7.6 22.6,7.6 25.6,7.6 28.6,7.6 31.6,7.6 34.6,7.6 37.6,7.6 12.1,10.6 33.1,10.6 36.1,10.6 37.6,13.6 24.1,16.6 36.1,16.6 37.6,19.6 30.1,22.6 36.1,22.6 37.6,25.6 12.1,28.6 27.1,28.6 30.1,28.6 10.6,31.6 16.6,31.6 3.1,34.6 15.1,34.6 33.1,34.6 34.6,37.6 37.6,37.6 3.1,40.6 12.1,40.6 33.1,40.6 28.6,43.6 34.6,43.6 27.1,46.6 33.1,46.6
  other v4: 15.627,40.1
LED1: D4.32 VD2.1 | length 12.7
  Top Layer w0.15: VD2.1 11.35,22 v1(13.75,22) ; D4.32 14.029,16.284 14.029,15.671 14.029,15.645 14.19,15.484 14.216,15.484 14.6,15.1 15.07,15.1 v1(15.135,15.165)
  Bottom Layer w0.15: v1(13.75,22) 13.75,15.956 14.6,15.106 15.076,15.106 v1(15.135,15.165)
LED2: D4.33 VD3.1 | length 14.9
  Top Layer w0.15: VD3.1 11.25,25.7 v1(11.876,25.7) ; D4.33 13.527,16.286 13.527,15.058 13.633,14.952 13.668,14.952 13.907,14.713 v1(14.029,14.713)
  Bottom Layer w0.15: v1(11.876,25.7) 11.962,25.614 12.392,25.614 13.175,24.831 13.175,16.102 14.029,15.248 v1(14.029,14.713)
LIS2_INT1: D2.11 D4.12 | length 31.1
  Top Layer w0.15: D2.11 3.8,28.5 3.8,29.074 4.726,30 v1(6.3,30) ; D4.12 v1(17.454,9.204)
  Bottom Layer w0.15: v1(6.3,30) 6.697,29.603 6.697,26.575 7.272,26 7.272,19.512 7.139,19.379 7.139,18.336 14.698,10.776 14.737,10.776 15.616,9.897 15.91,9.897 16.603,9.204 v1(17.454,9.204)
LIS2_INT2: D2.9 D4.13 | length 28.7
  Top Layer w0.15: D2.9 4.822,28.522 4.822,28.797 4.993,28.968 5.361,28.968 5.644,28.685 6.036,28.685 v1(6.122,28.599) ; v1(6.697,19.75) 6.697,19.628 6.493,19.424 6.493,19.108 6.955,18.646 v1(7.714,18.646) ; v1(17.454,10.2) 18.221,9.434 18.879,9.434 D4.13
  Bottom Layer w0.15: v1(6.122,28.599) 6.122,26.721 6.953,25.89 6.953,21.843 6.78,21.67 6.78,19.833 v1(6.697,19.75) ; v1(7.714,18.646) 7.783,18.577 7.783,18.121 14.824,11.079 14.862,11.079 15.742,10.2 v1(17.454,10.2)
LIS_INT1: D1.11 D4.45 | length 22.6
  Top Layer w0.15: D1.11 3.8,23.525 3.8,23.883 5.071,25.153 v1(6.036,25.153) ; v1(5.5,11.7) 6.341,10.859 D4.45
  Bottom Layer w0.15: v1(5.5,11.7) 5.5,11.713 6.367,12.58 6.367,16.246 5.803,16.81 5.803,23.238 6.036,23.471 v1(6.036,25.153)
LIS_INT2: D1.9 D4.46 | length 19.8
  Top Layer w0.15: D1.9 5.748,23.475 5.876,23.347 5.983,23.347 6.33,23 v1(6.378,23) ; v1(5.708,10.678) 5.811,10.678 6.131,10.359 D4.46
  Bottom Layer w0.15: v1(5.708,10.678) 5.708,10.688 6.67,11.65 6.67,16.371 6.122,16.92 6.122,19.988 6.378,20.244 v1(6.378,23)
LIS_MODE: D1.8 D2.8 D4.10 | length 27.1
  Top Layer w0.15: v1(4.21,27.671) 4.237,27.698 4.948,27.698 D2.8 ; v1(4.267,22.696) 4.294,22.723 4.948,22.723 4.971,22.7 5.314,22.7 5.8,22.214 5.8,18.851 v1(6.697,17.954) ; v1(15.7,9.204) 15.748,9.204 16.382,8.57 16.382,8.081 16.454,8.009 16.379,7.934 D4.10
  Bottom Layer w0.15: v1(4.21,27.671) 4.833,27.048 4.833,24.915 4.267,24.349 v1(4.267,22.696) ; v1(6.697,17.954) 14.451,10.2 14.885,10.2 15.413,9.672 15.413,9.612 15.7,9.325 v1(15.7,9.204)
LoRa_DIO0: A2.8 D4.19 | length 20.2
  Top Layer w0.15: D4.19 18.971,12.375 20.814,12.375 21.139,12.7 v1(31.5,12.7)
  Bottom Layer w0.15: v1(31.5,12.7) 33.402,12.7 34.81,14.108 A2.8
LoRa_MISO: A2.7 D4.16 | length 23.5
  Top Layer w0.15: D4.16 31.859,10.859 33.1,12.1 33.1,16.963 33.399,17.262 33.399,18.859 A2.7
LoRa_MOSI: A2.6 D4.17 | length 19.9
  Top Layer w0.15: D4.17 31.859,11.359 32.759,12.259 32.759,16.917 32.27,17.406 A2.6
LoRa_NSS: A2.4 D4.14 | length 19
  Top Layer w0.15: D4.14 28.6,9.859 28.614,9.872 28.806,9.872 28.978,9.7 v1(29.1,9.7)
  Bottom Layer w0.15: v1(29.1,9.7) 29.186,9.786 29.186,10.022 30.365,11.201 30.365,17.04 29.73,17.675 A2.4
LoRa_RST: A2.3 D4.18 | length 17.6
  Top Layer w0.15: D4.18 26.937,11.859 27.178,12.1 v1(27.3,12.1)
  Bottom Layer w0.15: v1(27.3,12.1) 28.319,13.119 28.319,18.859 A2.3
LoRa_SCK: A2.5 D4.15 | length 22.5
  Top Layer w0.15: D4.15 30.02,10.359 30.235,10.143 v1(30.357,10.143)
  Bottom Layer w0.15: v1(30.357,10.143) 30.365,10.143 30.614,10.392 30.762,10.392 30.859,10.49 30.859,18.859 A2.5
NetA1_2: A1.2 R15.1 | length 7.6
  Top Layer w0.5: A1.2 16.02,37.21 16.02,38.807 16.313,39.1 18.9,39.1 20,40.2 R15.1
NetA2_2: A2.2 R16.1 | length 8.4
  Top Layer w1: R16.1 22.7,22.094 27.064,17.73 A2.2
NetBQ1_3: BQ1.3 C15.1 R13.2 | length 4.4
  Top Layer w0.5: BQ1.3 19.538,3.538 19.804,3.538 20.787,3.538 C15.1@20.787,3.313 ; R13.2 19.65,3.85 19.546,3.746 19.538,3.746 BQ1.3@19.846,3.746 ; C15.1@20.787,3.313 C15.1 ; C15.1@20.787,3.313 C15.1 ; C15.1@20.787,3.313 C15.1
NetC2_1: C2.1 D1.16 R1.2 | length 13.6
  Top Layer w0.254: D1.16@2.35,21.748 1.352,21.748 1,22.1 1,27.863 2.627,29.49 2.627,29.702 4.325,31.4 5.65,31.4 R1.2
NetC3_1: C3.1 VD1.3 | length 2.2
  Top Layer w0.254: C3.1 19.073,21.473 19.073,22.123 19.75,22.8 VD1.3
NetC3_2: C3.2 R2.2 | length 1.7
  Top Layer w0.254: R2.2 20.7,19.546 C3.2
NetC9_1: C9.1 R6.2 R8.1 | length 4.6
  Top Layer w0.254: R6.2 19.5,26.6 19.127,26.973 19.127,28.423 C9.1 19.099,29.049 19.099,29.732 19.35,29.984 19.357,29.984 19.357,30.157 R8.1
NetC10_1: C10.1 D3.4 | length 1.7
  Top Layer w0.5: D3.4 16.85,41.4 18.45,41.4 C10.1
NetC11_1: C11.1 R8.2 R10.2 VT1.3 | length 13.4
  Top Layer w0.254: R8.2 18.327,30.827 18.327,31.453 18.427,31.553 18.427,31.602 18.825,32 C11.1 19.073,32.223 19.073,33.127 18.7,33.5 18.948,33.5 23.373,37.925 23.373,39.585 23.565,39.777 23.678,39.777 23.827,39.926 23.827,40.377 VT1.3
NetC13_2: C13.2 D5.2 | length 1.7
  Top Layer w0.254: D5.2 32.58,32.61 C13.2
NetC16_2: C16.2 D5.6 | length 1.7
  Top Layer w0.254: C16.2 27.5,32.53 D5.6
NetC18_1: C18.1 D5.3 | length 5.7
  Top Layer w0.254: D5.3 31.3,30.99 31.3,30 31.8,29.5 C18.1
NetC18_2: C18.2 D5.1 | length 2
  Top Layer w0.254: D5.1 33.85,31.027 34.023,31.2 C18.2
NetC19_1: C19.1 D5.5 | length 1.7
  Top Layer w0.254: D5.5 28.77,32.55 C19.1
NetC19_2: C19.2 D5.4 | length 1.9
  Top Layer w0.254: D5.4 30.2,31.16 30.177,31.183 30.177,32.282 30.575,32.68 C19.2
NetD2_10: D2.10 R7.2 | length 5.2
  Top Layer w0.15: D2.10 4.3,28.5 4.3,28.789 4.885,29.374 v1(7.6,29.374) R7.2
NetD4_7: D4.7 R12.1 | length 8.9
  Top Layer w0.15: R12.1 8.643,6 9.457,6.814 9.614,6.814 v1(9.7,6.9) ; v1(13.878,9.287) 14.364,8.802 14.838,8.802 14.954,8.686 D4.7
  Bottom Layer w0.15: v1(9.7,6.9) 10.97,8.17 11.168,8.17 11.8,8.802 13.515,8.802 13.621,8.908 13.878,9.165 v1(13.878,9.287)
NetD4_44: D4.44 R11.1 | length 6.6
  Top Layer w0.254: R11.1 4.4,12.45 6.812,12.45 7.904,11.359 D4.44
NetE3_1: E3.1 K1.4 | length 3.6
  Top Layer w1: K1.4 E3.1
NetE4_1: E4.1 K1.5 | length 3.6
  Top Layer w1: K1.5 E4.1
NetK1_8: K1.8 VT2.1 VT2.2 VT2.3 | length 3.1
  Top Layer w0.5: 28,36.75 28.05,36.8 K1.8
NetR6_1: R6.1 VD1.2 | length 2
  Top Layer w0.254: R6.1 17.85,26.508 18.427,25.931 18.427,25.373 VD1.2
NetR9_2: R9.2 VT1.1 | length 2.7
  Top Layer w0.254: VT1.1 25.15,41.669 25.669,41.15 R9.2
NetR14_1: R14.1 VD2.2 | length 2.2
  Top Layer w0.15: R14.1 9.778,22.205 10.725,23.152 10.725,23.425 11.05,23.75 VD2.2
NetR17_1: R17.1 VD3.2 | length 1.4
  Top Layer w0.254: R17.1 10.003,27.35 VD3.2
PB10: D4.21 X4.4 | length 15.6
  Top Layer w0.15: v1(14.838,9.434) 14.838,11.685 16.512,13.359 D4.21
  Bottom Layer w0.15: X4.4 13.247,2.007 13.247,7.843 v1(14.838,9.434)
PC13: D4.2 X4.1 | length 10.4
  Top Layer w0.15: X4.1 6.145,2.525 6.402,2.525 7.177,3.3 9.2,3.3 12.454,6.554 D4.2
PC14: D4.3 X4.2 | length 8.4
  Top Layer w0.15: X4.2 8.117,1.7 12.954,6.537 D4.3
PC15: D4.4 X4.3 | length 7.4
  Top Layer w0.15: X4.3 10.707,2.007 10.707,3.861 13.454,6.608 D4.4
PDC_OUT_EN: D4.40 R9.1 | length 40.8
  Top Layer w0.254: D4.40 15.699,13.359 v1(16.106,13.766) ; R9.1 26.6,42.8 27.934,41.466 27.934,40.966 v1(28,40.9)
  Bottom Layer w0.254: v1(16.106,13.766) 16.172,13.832 16.48,13.832 28.25,25.602 28.25,40.578 28,40.828 v1(28,40.9)
PDC_OUT_PWM: D4.38 R2.1 | length 12.9
  Top Layer w0.254: D4.38 10.477,14.336 11.19,14.336 11.381,14.144 11.381,14.119 11.625,13.875 15.117,13.875 15.686,14.445 ; 15.686,14.446 15.859,14.619 v1(15.859,14.713) ; R2.1 19.3,19.154 v1(19.3,17.7)
  Bottom Layer w0.254: v1(15.859,14.713) 16.785,14.713 19.3,17.227 v1(19.3,17.7)
R1OUT_RS232: D5.13 X5.2 | length 10.6
  Top Layer w0.254: D5.13 30.04,26.075 31.961,27.996 36.456,27.996 X5.2
RES_LIS1: D1.10 D4.41 | length 17.1
  Top Layer w0.15: D1.10 4.3,23.525 4.3,23.814 4.788,24.302 5.033,24.302 v1(5.119,24.388) ; v1(4.845,16.69) 4.931,16.604 4.931,15.926 7.998,12.859 D4.41
  Bottom Layer w0.15: v1(4.845,16.69) 4.845,16.729 5.5,17.384 5.5,24.007 v1(5.119,24.388)
SA0_LIS1: D1.7 D4.39 | length 11.6
  Top Layer w0.15: D1.7 5.025,22.2 5.314,22.2 5.475,22.039 5.475,17.525 9.141,13.859 D4.39
SA0_LIS2: D2.7 D4.20 | length 25.7
  Top Layer w0.15: D2.7 v1(7.6,27.225) ; v1(15.6,11.6) 16.272,12.272 16.681,12.272 17.267,12.859 D4.20
  Bottom Layer w0.15: v1(7.6,27.225) 7.6,26.529 7.878,26.251 7.878,19.991 8.9,18.969 8.9,17.86 15.075,11.685 15.515,11.685 v1(15.6,11.6)
SCL_LIS: D1.4 D2.4 D4.42 R3.1 | length 19.7
  Top Layer w0.15: D1.4 4.225,21 4.225,19.625 v1(4.2,19.6) 4.2,18.879 4.267,18.812 R3.1 4.27,18.476 4.27,16.159 8.07,12.359 D4.42 ; D2.4 4.25,25.161 v1(4.258,25.153)
  Bottom Layer w0.15: v1(4.2,19.6) 4.2,19.722 3.936,19.986 3.936,22.213 3.692,22.458 3.692,24.588 v1(4.258,25.153)
SD_MISO: A1.3 D4.26 | length 22.2
  Top Layer w0.254: A1.3 13.27,33.13 14.9,31.5 14.9,23.727 16.954,21.673 D4.26
SD_MOSI: A1.4 D4.25 | length 23.7
  Top Layer w0.254: A1.4 10.832,36.898 10.832,34.868 14,31.7 14,26.181 14.207,25.974 14.207,25.439 v1(14.273,25.373) ; v1@15.755,24.426 15.755,23.745 17.431,22.069 17.431,16.382 D4.25
  Bottom Layer w0.254: v1(14.273,25.373) 14.339,25.307 14.874,25.307 v1(15.754,24.426)
SD_NSS: A1.6 D4.28 | length 26
  Top Layer w0.254: A1.6 7.2,35.45 8.974,35.45 13.186,31.238 13.186,24.085 15.977,21.294 15.977,16.382 D4.28
SD_SCK: A1.5 D4.27 | length 24.1
  Top Layer w0.254: A1.5 8.19,36.81 13.593,31.407 13.593,24.426 16.477,21.542 16.477,16.952 16.477,16.382 D4.27
SDA_LIS: D1.6 D2.6 D4.43 R5.1 | length 22.5
  Top Layer w0.15: v1(3.25,17.68) 3.25,16.633 R5.1 3.625,16.208 3.792,16.208 8.141,11.859 D4.43 ; v1(3.302,22.034) 3.424,22.034 3.681,21.777 4.948,21.777 D1.6 ; v1(4.1,26.8) 4.175,26.725 D2.6
  Bottom Layer w0.15: v1(3.25,17.68) 3.276,17.706 3.276,22.008 v1@3.304,22.036 ; v1@3.3,17.695 v1@3.302,17.698 ; v1(3.302,22.034) 3.302,25.097 3.692,25.486 3.692,26.392 v1(4.1,26.8)
SWCLK: D4.37 X3.3 | length 12.8
  Top Layer w0.15: v1(9.012,14.801) 9.018,14.807 10.403,14.807 D4.37
  Bottom Layer w0.15: X3.3 1.9,9.6 6.925,9.6 8.4,11.075 8.4,14.3 8.901,14.801 v1(9.012,14.801)
SWDIO: D4.34 X3.2 | length 17.7
  Top Layer w0.15: v1(8.409,15.406) 8.411,15.404 12.713,15.404 12.931,15.621 12.931,16.335 D4.34
  Bottom Layer w0.15: X3.2 2.116,11.724 2.116,11.184 3.397,9.903 6.799,9.903 8.097,11.201 8.097,14.634 8.173,14.71 8.173,15.148 8.409,15.384 v1(8.409,15.406)
T1OUT_RS232: D5.14 X5.1 | length 8.3
  Top Layer w0.254: D5.14 31.31,26.075 32.735,27.5 X5.1
UART_RX: D4.31 D5.12 | length 20.6
  Top Layer w0.15: D4.31 14.527,16.431 14.527,19.527 v1(14.6,19.6) ; v1(24.49,23.475) 27.745,23.475 28.77,24.5 D5.12
  Bottom Layer w0.15: v1(14.6,19.6) 20.615,19.6 v1(24.49,23.475)
UART_TX: D4.30 D5.11 | length 19.3
  Top Layer w0.15: D4.30 14.954,18.427 15.175,18.648 15.175,20.391 v1(15.166,20.4) ; v1(24.8,24.271) 27.271,24.271 27.5,24.5 D5.11
  Bottom Layer w0.15: v1(15.166,20.4) 19.953,20.4 23.824,24.271 v1(24.8,24.271)
V_SOURCE: D3.1 D3.3 K1.3 R4.1 X2.1 | length 48.6
  Top Layer w0.35: v4(11.641,43.117) 11.788,43.117 12.271,43.6 13.7,43.6 14.05,43.25 D3.1
  Top Layer w0.5: R4.1 9.122,43.046 9.122,43.158 9.191,43.089 9.191,43.079 9.25,43.021 11.545,43.021 v4(11.641,43.117) 11.641,42.987 13.284,41.344 14.194,41.344 D3.3 ; R4.1@9.25,43.175 9.25,43.58 9.27,43.6 X2.1
  Top Layer w1: K1.3 36.14,42.246 36.754,42.86 37.543,42.86 38.25,43.567 v4(38.25,47.25)
  Bottom Layer w1: X2.1 9.374,45.584 11.084,45.584 14,48.5 36.946,48.5 38.196,47.25 v4(38.25,47.25)
VACC: E1.1 X2.2 | length 3
  Top Layer w1: X2.2 12.23,48.02 E1.1
VBAT_CTRL: C8.1 D4.11 R1.1 R4.2 | length 42.3
  Top Layer w0.15: v1@6.241,41.166 v1(6.3,41.225) C8.1 ; v1(16,10.8) 15.954,10.754 15.954,9.853 16.954,8.853 D4.11
  Top Layer w0.254: R1.1 5.75,33.1 v1(6.8,33.1) 7.3,32.6 v1(7.3,30.3)
  Top Layer w0.5: C8.1 R4.2
  Bottom Layer w0.15: v1(7.3,30.3) 7.3,30.287 7,29.987 7,26.7 7.575,26.125 7.575,19.865 8.4,19.04 8.4,17.932 14.949,11.382 14.988,11.382 15.484,10.886 15.914,10.886 v1(16,10.8)
  Bottom Layer w0.254: v1(6.3,41.225) 6.3,39.531 6.831,39 6.831,33.131 v1(6.8,33.1)
VBUS: X1.1 X2.3 | length 2.2
  Top Layer w0.4: 4.937,46.375 5.835,46.375 X2.3
VCC: C1.1 C4.1 C5.1 C6.1 C7.1 C12.1 C13.1 C17.1 D1.1 D1.14 D2.1 D2.14 D3.5 D4.1 D4.9 D4.24 D4.36 D4.48 D5.16 K1.1 R3.2 R5.2 R12.2 R15.2 R16.2 X3.1 | length 64.9
  Top Layer w0.254: v1(1.8,20.673) 2.553,20.673 2.702,20.822 2.702,20.927 2.75,20.975 D1.1 ; D2.14@2.427,27.727 1.949,27.727 1.8,27.578 v1(1.8,25.316) ; D1.14 2.073,22.75 1.8,23.023 v1(1.8,25.316) ; D2.1 2.75,25.465 2.601,25.316 v1(1.8,25.316) ; R12.2 6.943,6.05 6.943,7.219 7.092,7.368 8.168,7.368 C7.1 ; C1.1 C1.1@11.42,19.88 ; C6.1 11.445,18.25 11.843,17.852 11.843,17.827 11.954,17.715 D4.36 ; D4.9@15.977,7.859 15.977,7.123 16.169,6.932 18.321,6.932 C4.1 ; D4.24 20.034,14.859 21,15.825 C5.1
  Top Layer w0.3: C7.1 8.742,7.942 10.454,7.942 ; D4.48 10.454,7.942 ; D4.1 11.954,7.908 10.487,7.908 10.454,7.942
  Top Layer w0.5: R5.2 1.703,16.633 1.5,16.43 1.5,14.88 X3.1 ; R5.2@1.689,16.823 1.689,17.985 R3.2@2.35,18.646 ; v1(1.8,20.673) 1.819,20.654 1.819,19.627 2.1,19.346 2.1,18.896 R3.2@2.35,18.646 ; R3.2 R3.2@2.35,18.646 ; C6.1 C1.1@11.42,19.88 ; R15.2 20,45.95 20.3,46.25 ; C17.1 34.224,23.9 33.9,24.224 33.9,25.55 D5.16 35.473,25.6 36.073,26.2 v1(36.1,26.2)
  Top Layer w1: D3.5 16.85,43.25 16.85,44.473 16.45,44.873 C12.1 17.627,46.25 20.3,46.25 v4(25.473,46.25) ; v1(22.6,31.4) 22.7,31.3 R16.2 ; C13.1 34.375,32.68 35.989,34.294 35.989,35.014 36.002,35.027 36.002,35.7 ; K1.1 36.102,36.762 36.102,35.862 36.04,35.8 36.04,35.7 v1(37.5,35.7)
pads on no net: BQ1.2 BQ1.4 D1.2 D1.3 D1.13 D1.15 D2.2 D2.3 D2.13 D2.15 D2.16 D4.22 D4.29 D5.7 D5.8 D5.9 D5.10 K1.2 K1.7 X1.2 X1.3 X1.4 X2.4
copper on no net:
  other v3: 2.5,3 37.5,3 2.5,38.7 21.5,38.7

## Polygon pours and split planes (outlines as drawn)
GND on Top Layer "GND_POLYGON" (solid, remove dead copper, pour order 0): 0.25,49.75 39.75,49.75 39.75,0.25 0.5,0.25 0.25,0.5
GND on Bottom Layer "GND_POLYGON" (solid, pour order 2): 39.75,49.75 39.75,0.25 0.25,0.25 0.25,49.75

## Keep-outs
Keep-Out Layer:
  the board outline again, w0.1

## Dimensions
2.5,50 to 0,0 on Mechanical 13
0,42 to 40,47.5 on Mechanical 13

## Text inside footprints (layer, text, board x,y; h text height)
A2: Bottom Overlay "1 - GND / 2 - VCC / 3 - RST / 4 - NSS / 5 - SCK / 6 - MOSI / 7 - MISO / 8 - DIO0" at 34.2,15.9 h1 r90
D1: Top Overlay "X" at 1.75,22.357 h1 r90; Top Overlay "Y" at 3.5,24.107 h1 r90
D2: Top Overlay "X" at 1.75,27.332 h1 r90; Top Overlay "Y" at 3.5,29.082 h1 r90
X1: Mechanical 13 "PCB EDGE" at 0.25,40.6 h0.41 r270